# Altium PCB ST1-2-BASIS.PcbDoc (part 1 of 2)
Units mm, origin at the board's own origin, x right, y up, seen from the top; angles counter-clockwise.
Board outline 88 x 170 mm, 2 copper layers (Top Layer, Bottom Layer), stack 1.58 mm thick; 149 components, 86 nets, 501 pads, 138 vias.
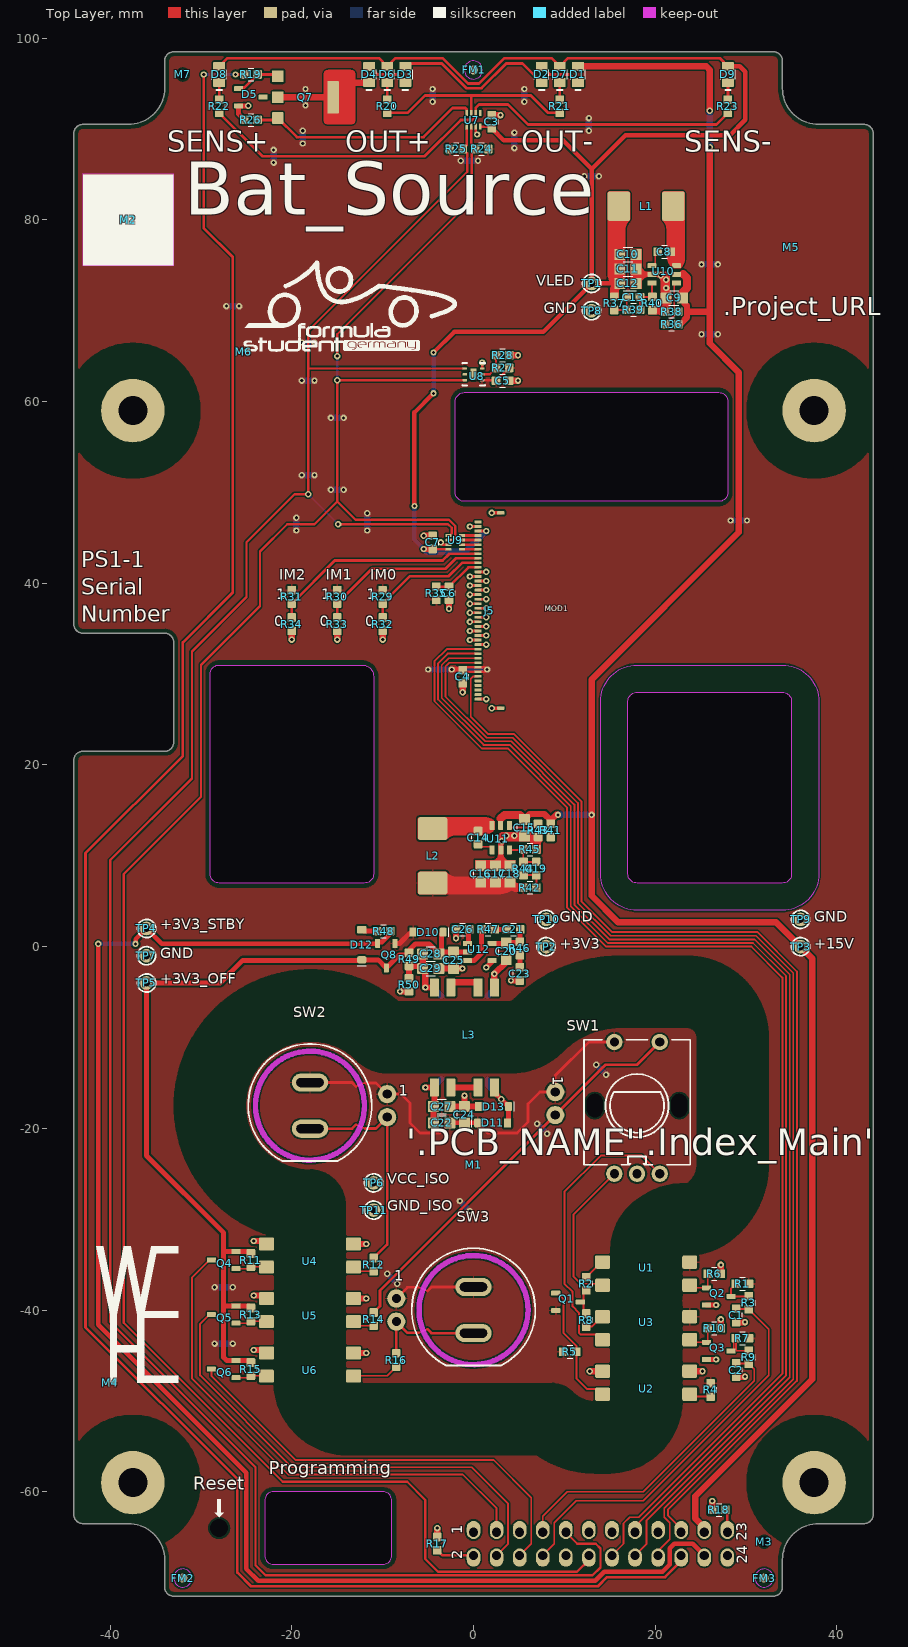
[diagram p0: Top Layer view]
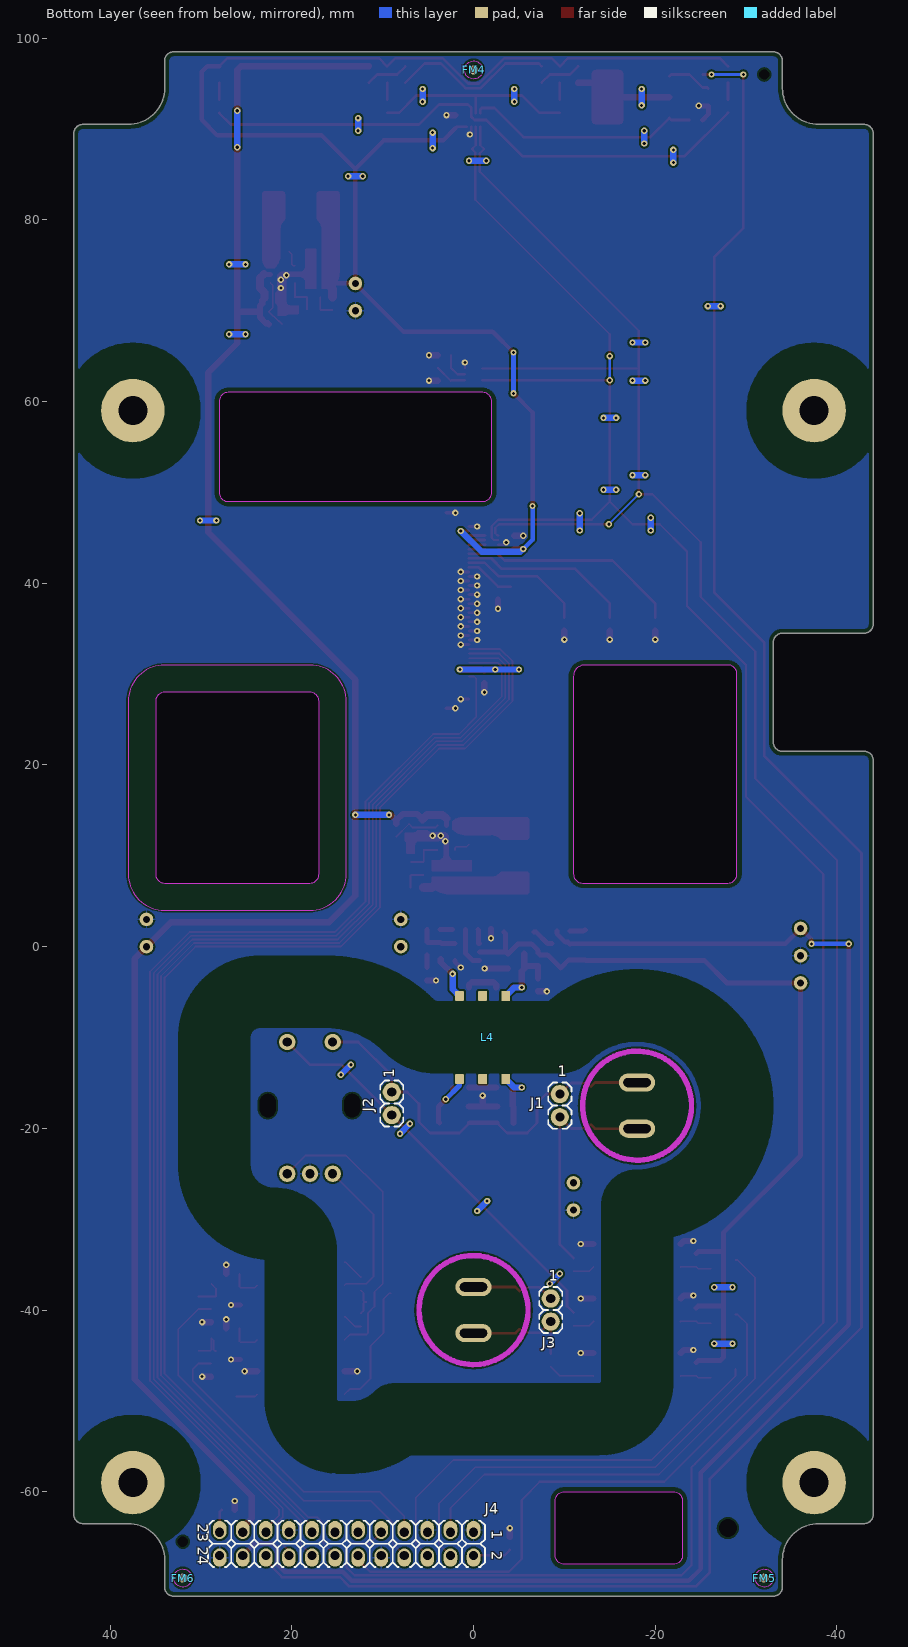
[diagram p1: Bottom Layer view, seen from below]

## Layer stack, top to bottom
Top Solder: solder mask 0.0102, Solder Resist, Dk 3.5
Top Layer: signal copper 0.035
Dielectric 1: dielectric 1.51, FR-4, Dk 4.8
Bottom Layer: signal copper 0.035
Bottom Solder: solder mask 0.0102, Solder Resist, Dk 3.5

## Board outline
-43,-63.5 cw(c-43,-62.5) -44,-62.5 -44,20.5 cw(c-43,20.5) -43,21.5 -34,21.5 ccw(c-34,22.5) -33,22.5 -33,33.5 ccw(c-34,33.5) -34,34.5 -43,34.5 cw(c-43,35.5) -44,35.5 -44,89.5 cw(c-43,89.5) -43,90.5 -38,90.5 ccw(c-38,94.5) -34,94.5 -34,97.5 cw(c-33,97.5) -33,98.5 33,98.5 cw(c33,97.5) 34,97.5 34,94.5 ccw(c38,94.5) 38,90.5 43,90.5 cw(c43,89.5) 44,89.5 44,-62.5 cw(c43,-62.5) 43,-63.5 38,-63.5 ccw(c38,-67.5) 34,-67.5 34,-70.5 cw(c33,-70.5) 33,-71.5 -33,-71.5 cw(c-33,-70.5) -34,-70.5 -34,-67.5 ccw(c-38,-67.5) -38,-63.5
cut-out: -23,-67 ccw(c-22,-67) -22,-68 -10,-68 ccw(c-10,-67) -9,-67 -9,-61 ccw(c-10,-61) -10,-60 -22,-60 ccw(c-22,-61) -23,-61
cut-out: -28,7 cw(c-28,8) -29,8 -29,30 cw(c-28,30) -28,31 -12.27,31 cw(c-12.27,29.73) -11,29.73 -11,8 cw(c-12,8) -12,7
cut-out: -1,49 cw(c-1,50) -2,50 -2,60 cw(c-1,60) -1,61 27,61 cw(c27,60) 28,60 28,50 cw(c27,50) 27,49
cut-out: 18,7 cw(c18,8) 17,8 17,27 cw(c18,27) 18,28 34,28 cw(c34,27) 35,27 35,8 cw(c34,8) 34,7

## Design rules (kind name [scope] priority, off if disabled: settings)
BoardOutlineClearance [not (InComponent('MOUSE*'))] p1: gap=0.5 ignorepadtopadclearanceinfootprint=FALSE except(0: Arc-SplitContinuation Track-SplitContinuation SMDPad-SplitContinuation THPad-SplitContinuation Via-SplitContinuation Fill-SplitContinuation Poly-SplitContinuation Region-SplitContinuation Text-SplitContinuation)
Clearance Clearance_Iso [InNetClass('ISO') vs Not (InNetClass('ISO') or not InNetClass('All Nets'))] p1: gap=8 ignorepadtopadclearanceinfootprint=FALSE except(0: Arc-Hole Track-Hole SMDPad-Hole THPad-Hole Via-Hole Fill-Hole Poly-Hole Region-Hole Text-Hole; 7.95: SMDPad-SMDPad)
Clearance Clearance_Mount [(ObjectKind = 'Pad') And (Net = 'No Net') And (Name = 'Free-M')] p2: gap=4 ignorepadtopadclearanceinfootprint=FALSE except(0: Arc-Hole Track-Hole SMDPad-Hole THPad-Hole Via-Hole Fill-Hole Poly-Hole Region-Hole Text-Hole)
Clearance [All] p3: gap=0.2 ignorepadtopadclearanceinfootprint=FALSE except(0: Arc-Hole Track-Hole SMDPad-Hole THPad-Hole Via-Hole Fill-Hole Poly-Hole Region-Hole Text-Hole; 0.15: Arc-Arc Arc-Track Arc-SMDPad Arc-THPad Arc-Via Arc-Text Track-Track Track-SMDPad Track-THPad Track-Via Track-Text SMDPad-SMDPad SMDPad-THPad SMDPad-Via SMDPad-Text THPad-THPad THPad-Via THPad-Text Via-Via Via-Text Text-Text)
ComponentClearance ComponentClearance_ESP-01S [All] p1: gap=0.254 collisioncheckmode=3 verticalgap=0.254 showdistances=FALSE
ComponentClearance ComponentClearance_Enclosure [isfree] p2: gap=0 collisioncheckmode=3 verticalgap=0 showdistances=FALSE
ComponentClearance [All] p3: gap=0.25 collisioncheckmode=3 verticalgap=0.25 showdistances=FALSE
Height [All] p1: minheight=0 maxheight=100 prefheight=12.7
HoleSize [All] p1: absolutevalues=TRUE maxlimit=27 minlimit=0.3 maxpercent=80.000 minpercent=20.000
HoleToHoleClearance [All] p1: gap=0.3 allowstackedmicrovias=TRUE
MinimumSolderMaskSliver [All] p1: minsoldermaskwidth=0.1
PolygonConnect [All] p1: thpad.connectstyle=Relief thpad.reliefconductorwidth=0.2 thpad.reliefentries=4 thpad.polygonreliefangle="90 Angle" thpad.airgapwidth=0.2 smdpad.connectstyle=Relief smdpad.reliefconductorwidth=0.2 smdpad.reliefentries=4 smdpad.polygonreliefangle="90 Angle" smdpad.airgapwidth=0.2 via.connectstyle=Direct via.reliefconductorwidth=0.254 via.reliefentries=4 via.polygonreliefangle="90 Angle" via.airgapwidth=0.254
RoomDefinition "User Input" [InComponentClass('User Input')] p1: confinementstyle=ConfineIn formatcopy=TRUE lockcomponents=FALSE outline -30,-4 -30,-51 32,-51 32,-4
RoomDefinition LED [InComponentClass('LED')] p2: confinementstyle=ConfineIn formatcopy=TRUE lockcomponents=FALSE outline -30,87 30,87 30,98 -30,98
RoomDefinition Display [InComponentClass('Display')] p3: confinementstyle=ConfineIn formatcopy=TRUE lockcomponents=FALSE outline -30,15 31,15 31,66 -30,66
RoomDefinition "Power VLED" [InComponentClass('Power VLED')] p4: confinementstyle=ConfineIn formatcopy=TRUE lockcomponents=FALSE outline 24,67 24,73 24,86 14,86 14,67
RoomDefinition "Backlight Driver" [InComponentClass('Backlight Driver')] p5: confinementstyle=ConfineIn formatcopy=TRUE lockcomponents=FALSE outline -6.5,43 -0.5,43 -0.5,67 -1.5,67 -1.5,47 -6.5,47
RoomDefinition "Isolated Power" [InComponentClass('Isolated Power')] p6: confinementstyle=ConfineIn formatcopy=TRUE lockcomponents=FALSE outline 6,3 -14,3 -14,-6 -6,-6 -6,-21 6,-21
RoomDefinition "Power +3V3" [InComponentClass('Power +3V3')] p7: confinementstyle=ConfineIn formatcopy=TRUE lockcomponents=FALSE outline 10,15 -9,15 -9,5 10,5
RoomDefinition Connector [InComponentClass('Connector')] p8: confinementstyle=ConfineIn formatcopy=TRUE lockcomponents=FALSE outline -5,-58.5 -5,-69.5 32,-69.5 32,-58.5
RoutingVias [All] p1: holewidth=0.35 width=0.7 viastyle="Through Hole" minholewidth=0.35 minwidth=0.7 maxholewidth=5 maxwidth=6
SilkToSilkClearance [All] p1: silktosilkclearance=0.1
SilkToSolderMaskClearance [IsPad] p1: minsilkscreentomaskgap=0.1 clearancetoexposedcopper=TRUE
SolderMaskExpansion "SolderMaskExpansion Via" [IsVia] p1: expansion=0.1 istentingtop=TRUE
SolderMaskExpansion [All] p2: expansion=0.05 istentingtop=FALSE
SupplyNets "Schematic Supply Nets_6" [InNet('GND_ISO')] p1: voltage=0.000
SupplyNets "Schematic Supply Nets_5" [InNet('+3V3_OFF')] p2: voltage=0.000
SupplyNets "Schematic Supply Nets_1" [InNet('VCC_ISO')] p3: voltage=0.000
SupplyNets "Schematic Supply Nets_4" [InNet('+15V')] p4: voltage=0.000
SupplyNets "Schematic Supply Nets_3" [InNet('VLED')] p5: voltage=0.000
SupplyNets "Schematic Supply Nets_2" [InNet('GND')] p6: voltage=0.000
SupplyNets "Schematic Supply Nets" [InNet('+3V3')] p7: voltage=0.000
UnRoutedNet [All] p1: checkbadconnections=TRUE
Width [All] p1: maxlimit=5 minlimit=0.15 preferedwidth=0.2 minimp=50.000000 maximp=50.000000 favimp=50.000000
22 further rules are at their usual default settings.

## Classes and differential pairs
net class ISO: BTN_ESC_ISO BTN_OK_ISO BTN_OUT_ISO GND_ISO NetC22_2 NetD11_2 NetL3_6 NetQ1_1 NetQ1_3 NetR2_2 NetR8_2 NetR12_2 NetR14_2 NetR16_2 NetSW1_A NetSW1_B VCC_ISO
component class "Isolated Power": C20 C21 C22 C23 C24 C25 C26 C27 C28 C29 D10 D11 D12 D13 L3 L4 Q8 R46 R47 R48 R49 R50 U12
component class "User Input": C1 C2 J1 J2 J3 Q1 Q2 Q3 Q4 Q5 Q6 R1 R2 R3 R4 R5 R6 R7 R8 R9 R10 R11 R12 R13 R14 R15 R16 SW1 SW2 SW3 U1 U2 U3 U4 U5 U6
component class "Power VLED": C8 C9 C10 C11 C12 C13 L1 R36 R37 R38 R39 R40 U10
component class "Power +3V3": C14 C15 C16 C17 C18 C19 L2 R41 R42 R43 R44 R45 U11
component class Display: C4 C5 C6 J5 MOD1 R27 R28 R29 R30 R31 R32 R33 R34 R35 U8
component class "Backlight Driver": C7 U9
component class PS1-2-Top: FM1 FM2 FM3 FM4 FM5 FM6 M1 M2 M3 M4 M5 M6 M7 TP1 TP2 TP3 TP4 TP5 TP6 TP7 TP8 TP9 TP10 TP11
component class Connector: J4 R17 R18
component class LED: C3 D1 D2 D3 D4 D5 D6 D7 D8 D9 Q7 R19 R20 R21 R22 R23 R24 R25 R26 U7

## Components (designator, comment, footprint, x,y, rotation, side; value= is the part's Value field where it differs from the comment)
C1 "100P/0603/50V/X7R" CAP0603_X7R 28.9,-40.6 r270 top value=100pF
C2 "100P/0603/50V/X7R" CAP0603_X7R 28.9,-46.6 r270 top value=100pF
C3 "100N/0603/50V/X7R" CAP0603_X7R 2,90.8 r90 top value=100nF
C4 "100N/0603/50V/X7R" CAP0603_X7R -1.2,29.7 r270 top value=100nF
C5 "100N/0603/50V/X7R" CAP0603_X7R 3.2,62.3 r0 top value=100nF
C6 "100N/0603/50V/X7R" CAP0603_X7R -2.7,38.9 r270 top value=100nF
C7 "100N/0603/50V/X7R" CAP0603_X7R -4.5,44.5 r90 top value=100nF
C8 "100N/0603/50V/X7R" CAP0603_X7R 21,76.5 r180 top value=100nF
C9 "10U/0805/50V/X5R" CAP0805_X7R 22.1,71.4 r180 top value=10uF
C10 "10U/0805/50V/X5R" CAP0805_X7R 17,76.2 r0 top value=10uF
C11 "10U/0805/50V/X5R" CAP0805_X7R 17,74.6 r0 top value=10uF
C12 "10U/0805/50V/X5R" CAP0805_X7R 17,73 r0 top value=10uF
C13 "47P/0603/50V/C0G" CAP0603_C0G 17.6,71.5 r0 top value=47pF
C14 "100N/0603/50V/X7R" CAP0603_X7R 0.5,12 r270 top value=100nF
C15 "10U/0805/50V/X5R" CAP0805_X7R 5.6,13.1 r270 top value=10uF
C16 "10U/0805/50V/X5R" CAP0805_X7R 0.8,8 r90 top value=10uF
C17 "10U/0805/50V/X5R" CAP0805_X7R 2.4,8 r90 top value=10uF
C18 "10U/0805/50V/X5R" CAP0805_X7R 4,8 r90 top value=10uF
C19 "47P/0603/50V/C0G" CAP0603_C0G 6.9,8.6 r90 top value=47pF
C20 "22U/0805/25V/X5R" CAP0805_X7R 3.6,-0.5 r270 top value=22uF
C21 "1U/0603/50V/X5R" CAP0603_X7R 4.4,1.9 r180 top value=1.0uF
C22 "4U7/0805/16V/X7R" CAP0805_X7R -3.5,-19.4 r180 top value=4.7uF
C23 "560P/0603/50V/C0G" CAP0603_C0G 5.1,-3 r270 top value=560pF
C24 "10U/0805/50V/X5R" CAP0805_X7R -1,-18.5 r90 top value=10uF
C25 "4U7/0805/16V/X7R" CAP0805_X7R -2.2,-1.5 r270 top value=4.7uF
C26 "1U/0603/50V/X5R" CAP0603_X7R -1.2,1.9 r180 top value=1.0uF
C27 "4U7/0805/16V/X7R" CAP0805_X7R -3.5,-17.6 r0 top value=4.7uF
C28 "10U/0805/50V/X5R" CAP0805_X7R -4.7,-0.8 r180 top value=10uF
C29 "10U/0805/50V/X5R" CAP0805_X7R -4.7,-2.4 r0 top value=10uF
D1 "LED Red" LED0805_RED 11.5,96 r90 top value=Red
D2 "LED Red" LED0805_RED 7.5,96 r90 top value=Red
D3 "LED Red" LED0805_RED -7.5,96 r90 top value=Red
D4 "LED Red" LED0805_RED -11.5,96 r90 top value=Red
D5 "BAV199" SOT2395P280X125-3-SE -24.5,93.5 r180 top
D6 "LED Green" LED0805_GREEN -9.5,96 r90 top value=Green
D7 "LED Green" LED0805_GREEN 9.5,96 r90 top value=Green
D8 "LED Green" LED0805_GREEN -28,96 r90 top value=Green
D9 "LED Green" LED0805_GREEN 28,96 r90 top value=Green
D10 "B5819W SL" SOD3718X125 -5,1.6 r180 top
D11 "B5819W SL" SOD3718X125 2.1,-19.4 r0 top
D12 "B5819W SL" SOD3718X125 -12.3,0.2 r90 top
D13 "B5819W SL" SOD3718X125 2.2,-17.6 r180 top
FM1 "Fidu" FIDU-1MM 0,96.5 r270 top
FM2 "Fidu" FIDU-1MM -32,-69.5 r270 top
FM3 "Fidu" FIDU-1MM 32,-69.5 r270 top
FM4 "Fidu" FIDU-1MM 0,96.5 r90 bottom
FM5 "Fidu" FIDU-1MM -32,-69.5 r90 bottom
FM6 "Fidu" FIDU-1MM 32,-69.5 r90 bottom
J1 "Header_1x2" HEAD_254_1X2 -9.5,-16.23 r180 bottom
J2 "Header_1x2" HEAD_254_1X2 9,-16 r180 bottom
J3 "Header_1x2" HEAD_254_1X2 -8.5,-38.73 r180 bottom
J4 "Header_2x12_8.34mm_2.5mm" HEAD_254_2X12_834_250 0,-64.46 r270 bottom
J5 "FPC_40_FH34SRJ" CON_FPC40_FH34SRJ 2.5,37 r90 top locked
L1 "22UH\7643" INDM7676X43 19,81.5 r180 top value=22UH
L2 "22UH\7643" INDM7676X43 -4.5,10 r270 top value=22UH
L3 "1:1.03/2MH/MXPP8" TR_MAXIN_MXPP8 -1,-10 r270 top
L4 "1:1.05/1.92MH/PPTI-1006" TR_WE_PPTI_1006-467 -1,-10 r270 bottom
M1 "PCB NAME" PCB-NAME-5MM-CENTER 0,-24 r0 top
M2 "SERIAL 2D" SERIAL-2D-10MM-RESTRICT -38,80 r0 top
M3 "Tooling JLC" TOOLING-JLC 32,-65.5 r270 top
M4 "LOGO WHE" LOGO-WHE-15MM -40,-48 r0 top
M5 "QR PROJ URL" QR-PROJECT-URL-15MM 35,77 r0 top
M6 "LOGO FSG" LOGO-FSG-10MM -25.3,65.5 r0 top
M7 "Tooling JLC" TOOLING-JLC -32,96 r270 top
MOD1 "NHD-2.4-240320AF-CSXP-2MM" NHD-2.4-240320AF-CSXP-2MM 0,37 r90 top locked
Q1 "BSS84" SOT2395P280X125-3-SE 10.4,-39.1 r180 top
Q2 "BSS138" SOT2395P280X125-3-SE 27,-38.5 r180 top
Q3 "BSS138" SOT2395P280X125-3-SE 27,-44.5 r180 top
Q4 "BSS84" SOT2395P280X125-3-SE -27.5,-34.5 r0 top
Q5 "BSS84" SOT2395P280X125-3-SE -27.5,-40.5 r0 top
Q6 "BSS84" SOT2395P280X125-3-SE -27.5,-46.5 r0 top
Q7 "BCP56T" SOT223-230P670X180-4-SW -18.5,93.5 r270 top
Q8 "BSS84" SOT2395P280X125-3-SE -9.6,-1 r90 top
R1 "10K/0603" R0603-0.40-WW 29.6,-37.1 r180 top value=10K
R2 "6K2/0603" R0603-0.40-WW 12.4,-37.1 r90 top value=6K2
R3 "100R/0603" R0603-0.40-WW 30.3,-39.2 r270 top value=100R
R4 "6K2/0603" R0603-0.40-WW 26.1,-48.8 r270 top value=6K2
R5 "100K/0603" R0603-0.40-WW 10.6,-44.6 r0 top value=100K
R6 "100K/0603" R0603-0.40-WW 26.5,-36 r0 top value=100K
R7 "10K/0603" R0603-0.40-WW 29.6,-43.1 r180 top value=10K
R8 "6K2/0603" R0603-0.40-WW 12.4,-41.1 r270 top value=6K2
R9 "100R/0603" R0603-0.40-WW 30.3,-45.2 r270 top value=100R
R10 "100K/0603" R0603-0.40-WW 26.5,-42 r0 top value=100K
R11 "100K/0603" R0603-0.40-WW -24.5,-34.5 r270 top value=100K
R12 "6K2/0603" R0603-0.40-WW -11,-35 r270 top value=6K2
R13 "100K/0603" R0603-0.40-WW -24.5,-40.5 r270 top value=100K
R14 "6K2/0603" R0603-0.40-WW -11,-41 r270 top value=6K2
R15 "100K/0603" R0603-0.40-WW -24.5,-46.5 r270 top value=100K
R16 "6K2/0603" R0603-0.40-WW -8.5,-45.5 r270 top value=6K2
R17 "10K/0603" R0603-0.40-WW -4,-65.7 r270 top value=10K
R18 "10K/0603" R0603-0.40-WW 27,-62 r180 top value=10K
R19 "2K/0603" R0603-0.40-WW -24.5,96 r0 top value=2K
R20 "10R/0603" R0603-0.40-WW -9.5,92.5 r270 top value=10R
R21 "10R/0603" R0603-0.40-WW 9.5,92.5 r270 top value=10R
R22 "10R/0603" R0603-0.40-WW -28,92.5 r270 top value=10R
R23 "10R/0603" R0603-0.40-WW 28,92.5 r270 top value=10R
R24 "4K7/0603" R0603-0.40-WW 0.9,87.8 r180 top value=4K7
R25 "4K7/0603" R0603-0.40-WW -1.9,87.8 r0 top value=4K7
R26 "360R/0603" R0603-0.40-WW -24.5,91 r180 top value=360R
R27 "10K/0603" R0603-0.40-WW 3.2,63.7 r180 top value=10K
R28 "10K/0603" R0603-0.40-WW 3.2,65.1 r0 top value=10K
R29 "10K/0603" R0603-0.40-WW -10,38.5 r270 top value=10K
R30 "10K/0603" R0603-0.40-WW -15,38.5 r270 top value=10K
R31 "10K/0603" R0603-0.40-WW -20,38.5 r270 top value=10K
R32 "10K/0603" R0603-0.40-WW -10,35.5 r270 top value=10K
R33 "10K/0603" R0603-0.40-WW -15,35.5 r270 top value=10K
R34 "10K/0603" R0603-0.40-WW -20,35.5 r270 top value=10K
R35 "10K/0603" R0603-0.40-WW -4.1,38.9 r90 top value=10K
R36 "120K/0603" R0603-0.40-WW 21.8,68.5 r180 top value=120K
R37 "10R/0603" R0603-0.40-WW 15.5,70.8 r270 top value=10R
R38 "30K/0603" R0603-0.40-WW 21.8,69.9 r180 top value=30K
R39 "30K/0603" R0603-0.40-WW 17.6,70.1 r0 top value=30K
R40 "10K/0603" R0603-0.40-WW 19.7,70.8 r270 top value=10K
R41 "120K/0603" R0603-0.40-WW 8.5,12.8 r270 top value=120K
R42 "10R/0603" R0603-0.40-WW 6.2,6.5 r0 top value=10R
R43 "30K/0603" R0603-0.40-WW 7.1,12.8 r270 top value=30K
R44 "62K/0603" R0603-0.40-WW 5.5,8.6 r90 top value=62K
R45 "27K/0603" R0603-0.40-WW 6.2,10.7 r0 top value=27K
R46 "10R/0603" R0603-0.40-WW 5.1,-0.2 r270 top value=10R
R47 "1K/0603" R0603-0.40-WW 1.6,1.9 r180 top value=1K
R48 "0R/0603" R0603-0.40-WW -9.9,1.7 r180 top value=0R
R49 "1M/0603" R0603-0.40-WW -7.1,-1.4 r270 top value=1M
R50 "1M/0603" R0603-0.40-WW -7.1,-4.2 r270 top value=1M
SW1 "MERP11-15125BM7" MERP11-15125BM7 18,-17.5 r0 top
SW2 "BTN 14MM BLACK" RS-BUTTON-14MM-BLACK -18,-17.5 r270 top locked
SW3 "BTN 14MM RED" RS-BUTTON-14MM-RED 0,-40 r270 top locked
TP1 "TP_THD_1.5/0.8" TP_THD_1.5/0.8 13,73 r0 top
TP2 "TP_THD_1.5/0.8" TP_THD_1.5/0.8 8,0 r0 top
TP3 "TP_THD_1.5/0.8" TP_THD_1.5/0.8 36,0 r0 top
TP4 "TP_THD_1.5/0.8" TP_THD_1.5/0.8 -36,2 r0 top
TP5 "TP_THD_1.5/0.8" TP_THD_1.5/0.8 -36,-4 r0 top
TP6 "TP_THD_1.5/0.8" TP_THD_1.5/0.8 -11,-26 r0 top
TP7 "TP_THD_1.5/0.8" TP_THD_1.5/0.8 -36,-1 r0 top
TP8 "TP_THD_1.5/0.8" TP_THD_1.5/0.8 13,70 r0 top
TP9 "TP_THD_1.5/0.8" TP_THD_1.5/0.8 36,3 r0 top
TP10 "TP_THD_1.5/0.8" TP_THD_1.5/0.8 8,3 r0 top
TP11 "TP_THD_1.5/0.8" TP_THD_1.5/0.8 -11,-29 r0 top
U1 "PC817C SMD" SOP254P1020X410-4 19,-36 r0 top
U2 "PC817C SMD" SOP254P1020X410-4 19,-48 r180 top
U3 "PC817C SMD" SOP254P1020X410-4 19,-42 r0 top
U4 "PC817C SMD" SOP254P1020X410-4 -18,-34 r180 top
U5 "PC817C SMD" SOP254P1020X410-4 -18,-40 r180 top
U6 "PC817C SMD" SOP254P1020X410-4 -18,-46 r180 top
U7 "LP5817DRLR" SOT50P210X60-8-SE 0,91 r270 top
U8 "OPT3004DNPR" SON065P200X200X65-6-EP065X130-CLEAR 0,63 r180 top
U9 "LP5816DRLR" SOT50P210X60-8-SE -2,44.5 r180 top
U10 "LV3842XF" SOT2395P280X125-6-NW 21,74 r0 top
U11 "LV3842XF" SOT2395P280X125-6-NW 3,12 r90 top
U12 "TPS60400" SOT2395P280X125-5-SW 0.7,-0.6 r270 top

## Footprints (in the part's own frame and the unit in brackets; to place one, negate y for a bottom-side part, rotate by r counter-clockwise, add the part's x,y. Pads: shape width x height; smd on the part's side, far side on the other; paste and mask are expansions set on the pad)
CAP0603_C0G [mm]
  rrect20% 0.95x0.95 smd: 1(-0.725,0) 2(0.725,0)
  silkscreen extent -0.3,-0.7 0.3,0.7, body extent -0.8,-0.41 0.8,0.41, height 0.57
CAP0603_X7R [mm]
  rrect20% 0.95x0.95 smd: 1(-0.725,0) 2(0.725,0)
  silkscreen extent -0.3,-0.7 0.3,0.7, body extent -0.8,-0.41 0.8,0.41, height 0.57
CAP0805_X7R [mm] "Chip Capacitor 0805mil / 2012mm"
  rrect10% 1.2x1.2 smd: 1(-0.9,0) 2(0.9,0)
  silkscreen extent -0.5,-0.8 0.5,0.8, body extent -1,-0.51 1,0.51, height 0.72
CON_FPC40_FH34SRJ [mm] "Hirose FH34SRJ 40-pin FPC connector"
  rrect50% 0.3x0.8 smd: 1(9.75,2) 2(9.25,2) 3(8.75,2) 4(8.25,2) 5(7.75,2) 6(7.25,2) 7(6.75,2) 8(6.25,2) 9(5.75,2) 10(5.25,2) 11(4.75,2) 12(4.25,2) 13(3.75,2) 14(3.25,2) 15(2.75,2) 16(2.25,2) 17(1.75,2) 18(1.25,2) 19(0.75,2) 20(0.25,2) 21(-0.25,2) 22(-0.75,2) 23(-1.25,2) 24(-1.75,2) 25(-2.25,2) 26(-2.75,2) 27(-3.25,2) 28(-3.75,2) 29(-4.25,2) 30(-4.75,2) 31(-5.25,2) 32(-5.75,2) 33(-6.25,2) 34(-6.75,2) 35(-7.25,2) 36(-7.75,2) 37(-8.25,2) 38(-8.75,2) 39(-9.25,2) 40(-9.75,2)
  rrect50% 0.4x0.8 smd: M1(10.75,-0.5) M2(-10.75,-0.5)
  body extent -11,-1 11,2.8, height 1
FIDU-1MM [mm] "Fiducial 1mm"
  round 1 smd mask+0.5: 1(0,0)
  Top Layer keep-out circle w0.1: c0,0 r1
HEAD_254_1X2 [mm] "Header 2.54mm 1x2"
  round 2 hole 1: 1(0,0) 2(0,-2.54)
  silkscreen extent -1.27,-3.81 1.27,1.27, body extent -1.27,-3.81 1.27,1.27, height 10
HEAD_254_2X12_834_250 [mm] "Header 2.54mm 2x12, Height 8.34mm, flange height 2.5mm"
  oval 2x1.5 hole 1 copper offset -0.25,0: 1(0,0) 3(0,-2.54) 5(0,-5.08) 7(0,-7.62) 9(0,-10.16) 11(0,-12.7) 13(0,-15.24) 15(0,-17.78) 17(0,-20.32) 19(0,-22.86) 21(0,-25.4) 23(0,-27.94)
  oval 2x1.5 hole 1 copper offset 0.25,0: 2(2.54,0) 4(2.54,-2.54) 6(2.54,-5.08) 8(2.54,-7.62) 10(2.54,-10.16) 12(2.54,-12.7) 14(2.54,-15.24) 16(2.54,-17.78) 18(2.54,-20.32) 20(2.54,-22.86) 22(2.54,-25.4) 24(2.54,-27.94)
  silkscreen extent -1.27,-29.21 3.81,1.27, body extent -1.27,-29.21 3.81,1.27, height 8.34
INDM7676X43 [mm]
  rrect20% 2.5x3.25 smd: 1(-3,0) 2(3,0)
  body extent -3.8,-3.8 3.8,3.8, height 4.3
LED0805_GREEN [mm]
  rrect20% 1x1.3 smd: 1(-0.9,0) 2(0.9,0)
  silkscreen extent -1.7,-0.8 0.5,0.8, body extent -1,-0.6 1,0.6, height 0.8
LED0805_RED [mm]
  rrect20% 1x1.3 smd: 1(-0.9,0) 2(0.9,0)
  silkscreen extent -1.7,-0.8 0.5,0.8, body extent -1,-0.6 1,0.6, height 0.8
LOGO-FSG-10MM [mm] "Source: https://www.formulastudent.de/pr/logos /  / Terms of use / Nutzungsbedingungen /  / \"Formula Student\" is registered trademark. The FSG logos are also subject to international copyright laws.  /  / EN: The right to use the FSG logo in an appropriate context is reserved to the teams, to the sponsors of the FSG event and to the press reporting on FSG. Other parties including the teams' sponsors are not allowed to use the FSG logo for any purpose. /  / DE: Teams, Sponsoren des FSG-Wettbewerb und Presse, die über die FSG berichtet, dürfen das FSG-Logo im entsprechenden Kontext frei verwenden. Anderen, die Sponsoren der Teams eingeschlossen, ist die Verwendung des FSG-Logos nicht gestattet."
  silkscreen extent 0.01,0.01 23.47,10.01, body extent 0.01,0.01 23.47,10.01, height 0.05
LOGO-WHE-15MM [mm]
  silkscreen extent -1.5,0 7.5,15
MERP11-15125BM7 [mm] "Knitter Switch MERP11-15125BM7 Encode with switch"
  round 1.8 hole 1: 1(-2.5,7) 2(2.5,7) A(-2.5,-7.5) B(2.5,-7.5) C(0,-7.5)
  round 0 hole 1.8 slot 2.6 at 90 deg unplated: M(-4.65,0) M(4.65,0)
  silkscreen extent -5.85,-6.5 5.85,7.25, body extent -5.85,-7.67 5.85,7.25, height 31.6
NHD-2.4-240320AF-CSXP-2MM [mm]
  body extent -21.4,-30.05 21.4,29.86, height 4.56
PCB-NAME-5MM-CENTER [mm]
QR-PROJECT-URL-15MM [mm] "QR Code Project URL 15mm"
R0603-0.40-WW [mm]
  rrect20% 0.95x0.95 smd: 1(-0.725,0) 2(0.725,0)
  silkscreen extent -0.3,-0.7 0.3,0.7, body extent -0.8,-0.4 0.8,0.4, height 0.3
RS-BUTTON-14MM-BLACK [mm]
  oval 2x4 hole 1 slot 3 at 90 deg: 1(-2.54,0) 2(2.54,0)
  silkscreen extent -6.8,-6.8 6.1,6.8, body extent -8.74,-8.75 8.75,8.75, height 18
RS-BUTTON-14MM-RED [mm]
  oval 2x4 hole 1 slot 3 at 90 deg: 1(-2.54,0) 2(2.54,0)
  silkscreen extent -6.8,-6.8 6.1,6.8, body extent -8.74,-8.75 8.75,8.75, height 18
SERIAL-2D-10MM-RESTRICT [mm] "Placeholder for 2D serial number (Dotmatrix or QR) / Size: 10mm"
  Top Layer keep-out region: -5,-5 5,-5 5,5 -5,5
  silkscreen extent -5,-5 5,5
SOD3718X125 [mm] "SOD-123"
  rrect50% 0.8x1 smd: 1(-1.65,0)
  rrect10% 0.8x1 smd: 2(1.65,0)
  silkscreen extent -2.3,-0.5 -2.3,0.5, body extent -1.85,-0.8 1.85,0.8, height 1.25
SON065P200X200X65-6-EP065X130-CLEAR [mm] "SON, 6-Leads, Body 2.00x2.00mm, Pitch 0.65mm, Thermal Pad 1.30x0.65mm, clear, IPC Medium Density"
  round 0.4 on Top Overlay: 1(-1.7,1.05)
  rrect50% 0.5x0.25 smd: 1(-0.95,0.65) 2(-0.95,0) 3(-0.95,-0.65) 4(0.95,-0.65) 5(0.95,0) 6(0.95,0.65)
  rrect20% 0.65x1.3 smd: EP(0,0)
  silkscreen extent -1.25,-1.25 1.25,1.25, body extent -1.07,-1.05 1.07,1.05, height 0.65
SOP254P1020X410-4 [mm] "SOP, 4-Leads, Body 4.60x6.50mm, Pitch 2.54mm, IPC Medium Density"
  rrect20% 1.65x1.45 smd: 1(-4.8,1.27) 2(-4.8,-1.27) 3(4.8,-1.27) 4(4.8,1.27)
  round 0.4 on Top Overlay: 1(-4.8,2.545)
  body extent -5.08,-2.45 5.08,2.45, height 4.1
SOT50P210X60-8-SE [mm] "SOT583"
  rrect25% 0.67x0.3 smd: 1(0.74,-0.75) 2(0.74,-0.25) 3(0.74,0.25) 4(0.74,0.75) 5(-0.74,0.75) 6(-0.74,0.25) 7(-0.74,-0.25) 8(-0.74,-0.75)
  round 0.2 on Top Overlay: 1(0.775,-1.175)
  body extent -0.8,-1.05 0.8,1.05, height 0.6
SOT223-230P670X180-4-SW [mm]
  rrect20% 1.3x1.3 smd: 1(-2.3,-3.05) 2(0,-3.05) 3(2.3,-3.05)
  rrect20% 3.6x1.3 smd: 4(0,3.05)
  body extent -3.5,-3.65 3.5,3.65, height 1.8
SOT2395P280X125-3-SE [mm] "SOT23-3, SC74"
  rrect25% 1x0.55 smd: 1(1.35,-0.95) 2(1.35,0.95) 3(-1.35,0)
  round 0.4 on Top Overlay: 1(1.6,-1.6)
  body extent -1.4,-1.45 1.4,1.45, height 1.26
SOT2395P280X125-5-SW [mm] "SOT23-5"
  round 0.4 on Top Overlay: 1(-1.6,-1.6)
  rrect25% 0.55x1 smd: 1(-0.95,-1.35) 2(0,-1.35) 3(0.95,-1.35) 4(0.95,1.35) 5(-0.95,1.35)
  body extent -1.45,-1.4 1.45,1.4, height 1.26
SOT2395P280X125-6-NW [mm] "SOT23-6"
  round 0.4 on Top Overlay: 1(-1.6,1.6)
  rrect25% 1x0.55 smd: 1(-1.35,0.95) 2(-1.35,0) 3(-1.35,-0.95) 4(1.35,-0.95) 5(1.35,0.01) 6(1.35,0.95)
  body extent -1.4,-1.45 1.4,1.45, height 1.26
TOOLING-JLC [mm] "Tooling holes as specified by JLCPCB"
  round 0 hole 1.152 unplated paste-2539.97 mask+0.65: 0(0,0)
TP_THD_1.5/0.8 [mm] "Testpoint THD 1.5mm / 0.8mm"
  round 1.5 hole 0.8: 1(0,0)
  silkscreen extent -1,-1 1,1
TR_MAXIN_MXPP8 [mm]
  round 0.4 on Top Overlay: 1(-6.1,4.2)
  rrect20% 2x1 smd: 1(-5.5,3.3) 2(-5.5,1.5) 3(-5.5,-1.5) 4(-5.5,-3.3) 5(5.5,-3.3) 6(5.5,-1.5) 7(5.5,1.5) 8(5.5,3.3)
  body extent -6.1,-4.25 6.1,4.25, height 3.61
TR_WE_PPTI_1006-467 [mm] "WE-PPTI push-pull-transformer, size 1006"
  rrect20% 1.12x0.96 smd: 1(-4.57,2.54) 2(-4.57,0) 3(-4.57,-2.54) 4(4.57,-2.54) 5(4.57,0) 6(4.57,2.54)
  round 0.4 on Bottom Overlay: 1(-4.455,3.559)
  body extent -5.1,-3.36 5.1,3.36, height 4.68

## Part data
C1 C2: "CAP SM 0603 100pF 50V X7R", Absolute Value=1E-10, Manufacturer=GENERIC, Manufacturer 1=YAGEO, Manufacturer Part Number 1=CC0603KPX7R9BB101, Manufacturer Part Number 2=CC0603KRX7R9BB101, Package=0603, Supplier Part Number 1=13-CC0603KPX7R9BB101CT-ND, Eurocircuits GPN=GPC0603101, HelpURL=https://www.yageo.com/upload/media/product/app/datasheet/mlcc/upy-gphc_x7r_6_3v-to-250v.pdf, Manufacturer 2=YAGEO, Part Number=100P/0603/50V/X7R, Supplier 1=Digi-Key, Supplier 2=Digi-Key, Supplier Part Number 2=311-3601-1-ND
C3 C4 C5 C6 C7 C8 C14: "CAP SM 0603 100nF 50V X7R", Absolute Value=1E-7, JLC Type=Basic, Manufacturer=GENERIC, Manufacturer 1=YAGEO, Manufacturer Part Number 1=CC0603KPX7R9BB104, Manufacturer Part Number 2=CC0603MRX7R9BB104, Manufacturer Part Number 3=CC0603KRX7R9BB104, Package=0603, Supplier Part Number 1=311-3567-1-ND, Eurocircuits GPN=GPC0603104, HelpURL=https://www.yageo.com/upload/media/product/app/datasheet/mlcc/upy-gphc_x7r_6_3v-to-250v.pdf, Manufacturer 2=YAGEO, Part Number=100N/0603/50V/X7R, Supplier 1=Digi-Key, Supplier 2=Digi-Key, Supplier 3=LCSC, Supplier Part Number 2=311-4110-1-ND, Supplier Part Number 3=C14663
C9 C10 C11 C12 C15 C16 C17 C18 C24 C28 C29: "CAP SM 0805 10uF 50V X5R", Absolute Value=1E-5, JLC Type=Basic, Manufacturer=GENERIC, Manufacturer 1="Murata Electronics", Manufacturer Part Number 1=GRM21BR61H106KE43K, Manufacturer Part Number 3=GRM21BR61H106KE43L, Package=0805, Supplier Part Number 1=490-GRM21BR61H106KE43KCT-ND, Eurocircuits GPN=GPN0805106-50-X5R, HelpURL=https://search.murata.co.jp/Ceramy/image/img/A01X/G101/ENG/GRM21BR61H106KE43-01A.pdf, Part Number=10U/0805/50V/X5R, Supplier 1=Digi-Key, Supplier 3=LCSC, Supplier Part Number 3=C440198
C13 C19: "CAP SM 0603 47pF 50V C0G", Absolute Value=4.7E-11, JLC Type=Basic, Manufacturer=GENERIC, Manufacturer 1=YAGEO, Manufacturer Part Number 1=CC0603JRNPO9BN470, Manufacturer Part Number 2=CC0603KRNPO9BN470, Manufacturer Part Number 3=CL10C470JB8NNNC, Package=0603, Supplier Part Number 1=311-1065-1-ND, Eurocircuits GPN=GPC0603470-C0G, HelpURL=https://www.yageo.com/upload/media/product/productsearch/datasheet/mlcc/UPY-GP_NP0_16V-to-50V_18.pdf, Manufacturer 2=YAGEO, Part Number=47P/0603/50V/C0G, Supplier 1=Digi-Key, Supplier 2=Digi-Key, Supplier 3=LCSC, Supplier Part Number 2=311-4037-1-ND, Supplier Part Number 3=C1671
C20: "CAP SM 0805 22uF 25V X5R", Absolute Value=2.2E-5, JLC Type=Basic, Manufacturer=GENERIC, Manufacturer 1="Samsung Electro-Mechanics", Manufacturer Part Number 1=CL21A226MAYNNNE, Manufacturer Part Number 3=CL21A226MAQNNNE, Package=0805, Supplier Part Number 1=1276-CL21A226MAYNNNECT-ND, Eurocircuits GPN=GPN0805106-25, HelpURL=https://mm.digikey.com/Volume0/opasdata/d220001/medias/docus/339/CL21A226MAYNNNE_Spec.pdf, Part Number=22U/0805/25V/X5R, Supplier 1=Digi-Key, Supplier 3=LCSC, Supplier Part Number 3=C45783
C21 C26: "CAP SM 0603 1.0uF 50V X5R", Absolute Value=1E-6, JLC Type=Basic, Manufacturer=GENERIC, Manufacturer 1="Samsung Electro-Mechanics", Manufacturer Part Number 1=CL10A105KB8NNNC, Package=0603, Supplier Part Number 1=1276-1860-1-ND, Eurocircuits GPN=GPC0603105-X5R, HelpURL=https://mm.digikey.com/Volume0/opasdata/d220001/medias/docus/658/CL10A105KB8NNNC_Spec.pdf, Manufacturer Part Number 3=CL10A105KB8NNNC, Part Number=1U/0603/50V/X5R, Supplier 1=Digi-Key, Supplier 3=LCSC, Supplier Part Number 3=C15849
C22 C25 C27: "CAP SM 0805 4.7uF 16V X7R", Absolute Value=4.7E-6, Manufacturer=GENERIC, Manufacturer 1=Murata, Manufacturer Part Number 1=GRM21BR71C475KE51L, Manufacturer Part Number 3=TCC0603X5R475M160CT, Package=0805, Supplier Part Number 1=490-14466-1-ND, Eurocircuits GPN=GPN0805475-16, HelpURL=https://search.murata.co.jp/Ceramy/image/img/A01X/G101/ENG/GRM21BR71C475KE51-01.pdf, Part Number=4U7/0805/16V/X7R, Supplier 1=Digi-Key, Supplier 3=LCSC, Supplier Part Number 3=C7393897
C23: "CAP SM 0603 560pF 50V C0G", Absolute Value=5.6E-10, JLC Type=Extended, Manufacturer=GENERIC, Manufacturer 1=YAGEO, Manufacturer Part Number 1=CC0603JRNPO9BN561, Manufacturer Part Number 2=CC0603GRNPO9BN561, Package=0603, Supplier Part Number 1=311-3359-1-ND, Eurocircuits GPN=GPC0603561-C0G, HelpURL=https://www.yageo.com/upload/media/product/productsearch/datasheet/mlcc/UPY-GP_NP0_16V-to-50V_18.pdf, Manufacturer 2=YAGEO, Manufacturer Part Number 3=CC0603JRNPO9BN561, Part Number=560P/0603/50V/C0G, Supplier 1=Digi-Key, Supplier 2=Digi-Key, Supplier 3=LCSC, Supplier Part Number 2=311-3937-1-ND, Supplier Part Number 3=C107054
D1 D2 D3 D4: library part "LED Red 0805", "Generic LED Red 0805", Absolute Value=Red, JLC Type=Basic, Manufacturer=GENERIC, Manufacturer 1=Würth, Manufacturer 3="Foshan NationStar Optoelectronics", Manufacturer Part Number 1=150080RS75000, Manufacturer Part Number 3=NCD0805R1, Package=805, Supplier Part Number 1=732-4984-1-ND, HelpURL=https://www.we-online.com/katalog/datasheet/150060RS75000.pdf, Part Number="LED Red 0805", Supplier 1=Digikey, Supplier 3=LCSC, Supplier Part Number 3=C84256
D5: "Silicon Low Leakage Diode 85V", Absolute Value=85V, Manufacturer="Infineon Technologies", Manufacturer 3=LRC, Manufacturer Part Number 1=BAV199E6433HTMA1, Manufacturer Part Number 3=LBAV199LT1G, Package=SOT23, Supplier Part Number 1=BAV199E6433HTMA1CT-ND, HelpURL=https://www.infineon.com/dgdl/bav199series.pdf?folderId=db3a30431400ef6801141c748874044e&fileId=db3a30431400ef6801141cba733104e5, Manufacturer 1="Infineon Technologies", Part Number=BAV199, Supplier 1=Digikey, Supplier 3=LCSC, Supplier Part Number 3=C12740
D6 D7 D8 D9: library part "LED Green 0805", "Generic LED Green 0805", Absolute Value=Green, JLC Type=Basic, Manufacturer=GENERIC, Manufacturer 1=Würth, Manufacturer 3="Hubei KENTO Elec", Manufacturer Part Number 1=150080GS75000, Manufacturer Part Number 3=KT-0805G, Package=805, Supplier Part Number 1=732-4983-1-ND, HelpURL=https://www.we-online.com/katalog/datasheet/150060VS75000.pdf, Part Number="LED Green 0805", Supplier 1=Digikey, Supplier 3=LCSC, Supplier Part Number 3=C2297
D10 D11 D12 D13: "40V 600mV@1A 1A SOD-123 Schottky Barrier Diodes", Absolute Value=40V, JLC Type=Basic, Manufacturer=GENERIC, Manufacturer 1="SMC Diode Solutions", Manufacturer 3="Jiangsu Changjing Electronics Technology Co., Ltd.", Manufacturer Part Number 1=B5819WSL, Package=SOD-123, Supplier Part Number 1=1655-B5819WSLCT-ND, HelpURL=https://datasheet.lcsc.com/lcsc/2304140030_Jiangsu-Changjing-Electronics-Technology-Co---Ltd--B5819W-SL_C8598.pdf, Manufacturer Part Number 3="B5819W SL", Part Number="B5819W SL", Supplier 1=Digikey, Supplier 3=LCSC, Supplier Part Number 3=C8598
FM1 FM2 FM3 FM4 FM5 FM6: library part Fidu_1mm, "Fiducial 1mm", Manufacturer=NONE, Part Number=Fidu_1mm
J1 J2 J3: "Header 100 mil 1x2", Manufacturer=GENERIC, Part Number=Header_1x2, System=Connector
J4: "Header 100 mil 2x12, Height 8.34mm, flange height 2.5mm", Manufacturer=GENERIC, Manufacturer 1="Sullins Connector Solutions", Manufacturer Part Number 1=PRPC012DAAN-RC, Supplier Part Number 1=S2011EC-12-ND, Part Number=Header_2x12_8.34mm_2.5mm, Supplier 1=Digi-Key, System=Connector
J5: "FPC connector, FH34 series, 40 pins", JLC Type=Extended, Manufacturer=Hirose, Manufacturer 1="Hirose Electric Co Ltd", Manufacturer 3=HRS, Manufacturer Part Number 1=FH34SRJ-40S-0.5SH(50), Supplier Part Number 1=H125755CT-ND, HelpURL=https://www.hirose.com/en/product/document?clcode=CL0580-1260-6-50&productname=FH34SRJ-40S-0.5SH(50)&series=FH34SRJ&documenttype=2DDrawing&lang=en&documentid=0001483059, Manufacturer Part Number 3=FH34SRJ-40S-0.5SH(50), Part Number=FPC_40_FH34SRJ, Supplier 1=Digi-Key, Supplier 3=LCSC, Supplier Part Number 3=C506798, System=Connector
L1 L2: "FIXED IND 22UH 1.75A 92.5MOHM SM", Absolute Value=2.2E-5, Manufacturer="Eaton - Electronics Division", Manufacturer 3="SXN(Shun Xiang Nuo Elec)", Manufacturer Part Number 1=DR74-220-R, Manufacturer Part Number 3=SMDRI74-220M, Package=7643, Supplier Part Number 1=513-1390-1-ND, HelpURL=https://www.eaton.com/content/dam/eaton/products/electronic-components/resources/data-sheet/eaton-dr-high-power-density-high-efficiency-shielded-drum-core-power-inductors-data-sheet.pdf, Manufacturer 1="Eaton - Electronics Division", Part Number=22UH\7643, Supplier 1=Digi-Key, Supplier 3=LCSC, Supplier Part Number 3=C164083
L3: "MXPP8 Push-Pull Transformer, Turns ratio 1:1.03, 2mH, Size MXPP8", JLC Type=Extended, Manufacturer="Wuxi Maxinmicro", Manufacturer Part Number 3=MXPP8-30-1103, Package=MXPP8, HelpURL=https://www.lcsc.com/datasheet/C19943836.pdf, Manufacturer 3="Wuxi Maxinmicro", Part Number=1:1.03/2MH/MXPP8, Supplier 3=LCSC, Supplier Part Number 3=C19943836
L4: "WE-PPTI Push-Pull Transformer, Turns ratio 1:1.05, 1.92mH, Size 1006, 750317829", Manufacturer=WE, Manufacturer 1="Würth Elektronik", Manufacturer 2="Wurth Elektronik", Manufacturer Part Number 1=750317829, Package=1006, Supplier Part Number 1=1297-750317829CT-ND, HelpURL=https://www.we-online.com/components/products/datasheet/750317829.pdf, Manufacturer Part Number 2=750317829, Part Number=1:1.05/1.92MH/PPTI-1006, Supplier 1=Digi-Key, Supplier 2=Mouser, Supplier Part Number 2=710-750317829
M1: library part "PCB NAME 5mm C", "PCB name, 5mm text height, centered", Manufacturer=NONE, Part Number="PCB NAME 5mm C"
M2: library part "SERIAL 2D 10MM RESTRICT", "2D Serial number placeholder, Dotmatrix or QR, size: 10mm, restriction on top layer", Manufacturer=NONE, Part Number="SERIAL 2D 10MM RESTRICT"
M3 M7: "Tooling hole for JLC (1.152mm)", Manufacturer=NONE, Part Number="Tooling JLC"
M4: library part "LOGO WHE 15MM", "WHE logo, size 15mm", Manufacturer=NONE, Part Number="LOGO WHE 15MM"
M5: library part "QR PROJ URL 15MM", "QR Code, Project URL, 15mm", Manufacturer=NONE, Part Number="QR PROJ URL 15MM"
M6: library part "LOGO FSG 10MM", "FSG logo, size 10mm", Manufacturer=NONE, Part Number="LOGO FSG 10MM"
MOD1: "NHD-2.4-240320AF-CSXP TFT Liquid Crystal Display, 2.4\", 240x320, RGB, high brightness, 2mm above PCB", Manufacturer="Newhaven Display", Manufacturer 1="Newhaven Display Intl", Manufacturer Part Number 1=NHD-2.4-240320AF-CSXP, Package="Display Module", Supplier Part Number 1=757-NHD-2.4-240320AF-CSXP-ND, HelpURL=https://newhavendisplay.com/content/specs/NHD-2.4-240320AF-CSXP.pdf, Part Number=NHD-2.4-240320AF-CSXP-2MM, Supplier 1=Digi-Key
Q1 Q4 Q5 Q6 Q8: "50V P-Channel MOSFET", JLC Type=Extended, Manufacturer=GENERIC, Manufacturer 1="Good-Ark Semiconductor", Manufacturer 2=LRC, Manufacturer 3="Jiangsu Changjing Electronics Technology Co., Ltd.", Manufacturer Part Number 2=LBSS84LT1G, Package=SOT23, Supplier Part Number 1=4786-BSS84CT-ND, HelpURL=https://goodarksemi.com/docs/datasheets/mosfets/BSS84.pdf, Manufacturer Part Number 1=BSS84, Manufacturer Part Number 3=BSS84, Part Number=BSS84, Supplier 1=Digi-Key, Supplier 2=LCSC, Supplier 3=LCSC, Supplier Part Number 2=C8492, Supplier Part Number 3=C114481
Q2 Q3: "N-Kanal 50 V 220mA (Ta) 350mW (Ta) Oberflächenmontage SOT-23", JLC Type=Extended, Manufacturer=GENERIC, Manufacturer 1="ANBON SEMICONDUCTOR (INT'L) LIMITED", Manufacturer 2=FOSAN, Package=SOT23, Supplier Part Number 1=4530-BSS138CT-ND, HelpURL=https://mm.digikey.com/Volume0/opasdata/d220001/medias/docus/3037/BSS138.pdf, Manufacturer 3=FOSAN, Manufacturer Part Number 1=BSS138, Manufacturer Part Number 2=BSS138, Manufacturer Part Number 3=BSS138, Part Number=BSS138, Supplier 1=Digi-Key, Supplier 2=LCSC, Supplier 3=LCSC, Supplier Part Number 2=C2926186, Supplier Part Number 3=C2926186
Q7: "BCP56T 80 V, 1 A NPN medium power transistor", Manufacturer="Nexperia USA Inc.", Manufacturer 3=Nexperia, Manufacturer Part Number 1=BCP56TF, Manufacturer Part Number 3=BCP56,115, Package=SOT223-4, Supplier Part Number 1=1727-7619-1-ND, HelpURL=https://assets.nexperia.com/documents/data-sheet/BCP56T_SER.pdf, Manufacturer 1="Nexperia USA Inc.", Part Number=BCP56T, Supplier 1=Digi-Key, Supplier 3=LCSC, Supplier Part Number 3=C22239
R1 R7 R17 R18 R27 R28 R29 R30 R31 R32 R33 R34 R35 R40: "RES SM 0603 10K", Absolute Value=10000, JLC Type=Basic, Manufacturer=GENERIC, Manufacturer 1=YAGEO, Manufacturer 3="UNI-ROYAL(Uniroyal Elec)", Manufacturer Part Number 1=RC0603FR-1310KL, Manufacturer Part Number 2=RC0603FR-1010KL, Manufacturer Part Number 3=0603WAF1002T5E, Package=0603, Supplier Part Number 1=13-RC0603FR-1310KLCT-ND, Eurocircuits GPN=GPR060310K, HelpURL=https://www.yageogroup.com/content/datasheet/asset/file/PYU-RC_GROUP_51_ROHS_L, Manufacturer 2=YAGEO, Part Number=10K/0603, Supplier 1=Digi-Key, Supplier 2=Digi-Key, Supplier 3=LCSC, Supplier Part Number 2=13-RC0603FR-1010KLCT-ND, Supplier Part Number 3=C25804
R2 R4 R8 R12 R14 R16: "RES SM 0603 6K2", Absolute Value=6200, JLC Type=Basic, Manufacturer=GENERIC, Manufacturer 1=YAGEO, Manufacturer 3=UNI-ROYAL, Manufacturer Part Number 1=RC0603FR-136K2L, Manufacturer Part Number 2=RC0603FR-106K2L, Manufacturer Part Number 3=0603WAF6201T5E, Package=0603, Supplier Part Number 1=13-RC0603FR-136K2LCT-ND, Eurocircuits GPN=GPR06036K2, HelpURL=https://www.yageogroup.com/content/datasheet/asset/file/PYU-RC_GROUP_51_ROHS_L, Manufacturer 2=YAGEO, Part Number=6K2/0603, Supplier 1=Digi-Key, Supplier 2=Digi-Key, Supplier 3=LCSC, Supplier Part Number 2=13-RC0603FR-106K2LCT-ND, Supplier Part Number 3=C4260
R3 R9: "RES SM 0603 100R", Absolute Value=100, Manufacturer=GENERIC, Manufacturer 1=YAGEO, Manufacturer 3="UNI-ROYAL(Uniroyal Elec)", Manufacturer Part Number 1=RC0603FR-13100RL, Manufacturer Part Number 2=RC0603FR-10100RL, Manufacturer Part Number 3=0603WAF1000T5E, Package=0603, Supplier Part Number 1=13-RC0603FR-13100RLCT-ND, Eurocircuits GPN=GPR0603100R, HelpURL=https://www.yageogroup.com/content/datasheet/asset/file/PYU-RC_GROUP_51_ROHS_L, Manufacturer 2=YAGEO, Part Number=100R/0603, Supplier 1=Digi-Key, Supplier 2=Digi-Key, Supplier 3=LCSC, Supplier Part Number 2=13-RC0603FR-10100RLCT-ND, Supplier Part Number 3=C22775
R5 R6 R10 R11 R13 R15: "RES SM 0603 100K", Absolute Value=100000, JLC Type=Basic, Manufacturer=GENERIC, Manufacturer 1=YAGEO, Manufacturer 3="UNI-ROYAL(Uniroyal Elec)", Manufacturer Part Number 1=RC0603FR-13100KL, Manufacturer Part Number 2=RC0603FR-10100KL, Manufacturer Part Number 3=0603WAF1003T5E, Package=0603, Supplier Part Number 1=13-RC0603FR-13100KLCT-ND, Eurocircuits GPN=GPR0603100K, HelpURL=https://www.yageogroup.com/content/datasheet/asset/file/PYU-RC_GROUP_51_ROHS_L, Manufacturer 2=YAGEO, Part Number=100K/0603, Supplier 1=Digi-Key, Supplier 2=Digi-Key, Supplier 3=LCSC, Supplier Part Number 2=13-RC0603FR-10100KLCT-ND, Supplier Part Number 3=C25803
R19: "RES SM 0603 2K", Absolute Value=2000, JLC Type=Basic, Manufacturer=GENERIC, Manufacturer 1=YAGEO, Manufacturer 3="UNI-ROYAL(Uniroyal Elec)", Manufacturer Part Number 1=RC0603FR-132KL, Manufacturer Part Number 2=RC0603FR-102KL, Manufacturer Part Number 3=0603WAF2001T5E, Package=0603, Supplier Part Number 1=13-RC0603FR-132KLCT-ND, Eurocircuits GPN=GPR06032K, HelpURL=https://www.yageogroup.com/content/datasheet/asset/file/PYU-RC_GROUP_51_ROHS_L, Manufacturer 2=YAGEO, Part Number=2K/0603, Supplier 1=Digi-Key, Supplier 2=Digi-Key, Supplier 3=LCSC, Supplier Part Number 2=13-RC0603FR-102KLCT-ND, Supplier Part Number 3=C22975
R20 R21 R22 R23 R37 R42 R46: "RES SM 0603 10R", Absolute Value=10, JLC Type=Basic, Manufacturer=GENERIC, Manufacturer 1=YAGEO, Manufacturer 3=UNI-ROYAL, Manufacturer Part Number 1=RC0603FR-1310RL, Manufacturer Part Number 2=RC0603FR-1010RL, Manufacturer Part Number 3=0603WAF100JT5E, Package=0603, Supplier Part Number 1=13-RC0603FR-1310RLCT-ND, Eurocircuits GPN=GPR060310R, HelpURL=https://www.yageogroup.com/content/datasheet/asset/file/PYU-RC_GROUP_51_ROHS_L, Manufacturer 2=YAGEO, Part Number=10R/0603, Supplier 1=Digi-Key, Supplier 2=Digi-Key, Supplier 3=LCSC, Supplier Part Number 2=13-RC0603FR-1010RLCT-ND, Supplier Part Number 3=C22859
R24 R25: "RES SM 0603 4K7", Absolute Value=4700, JLC Type=Basic, Manufacturer=GENERIC, Manufacturer 1=YAGEO, Manufacturer 3="UNI-ROYAL(Uniroyal Elec)", Manufacturer Part Number 1=RC0603FR-134K7L, Manufacturer Part Number 2=RC0603FR-104K7L, Manufacturer Part Number 3=0603WAF4701T5E, Package=0603, Supplier Part Number 1=13-RC0603FR-134K7LCT-ND, Eurocircuits GPN=GPR06034K7, HelpURL=https://www.yageogroup.com/content/datasheet/asset/file/PYU-RC_GROUP_51_ROHS_L, Manufacturer 2=YAGEO, Part Number=4K7/0603, Supplier 1=Digi-Key, Supplier 2=Digi-Key, Supplier 3=LCSC, Supplier Part Number 2=13-RC0603FR-104K7LCT-ND, Supplier Part Number 3=C23162
R26: "RES SM 0603 360R", Absolute Value=360, JLC Type=Extended, Manufacturer=GENERIC, Manufacturer 1=YAGEO, Manufacturer Part Number 1=RC0603FR-13360RL, Manufacturer Part Number 2=RC0603FR-07360RL, Package=0603, Supplier Part Number 1=13-RC0603FR-13360RLCT-ND, Eurocircuits GPN=GPR0603360R, HelpURL=https://www.yageogroup.com/content/datasheet/asset/file/PYU-RC_GROUP_51_ROHS_L, Manufacturer 2=YAGEO, Manufacturer 3=YAGEO, Manufacturer Part Number 3=RC0603FR-07360RL, Part Number=360R/0603, Supplier 1=Digi-Key, Supplier 2=Digi-Key, Supplier 3=LCSC, Supplier Part Number 2=311-360HRCT-ND, Supplier Part Number 3=C137739
R36 R41: "RES SM 0603 120K", Absolute Value=120000, JLC Type=Basic, Manufacturer=GENERIC, Manufacturer 1=YAGEO, Manufacturer 3="UNI-ROYAL(Uniroyal Elec)", Manufacturer Part Number 1=RC0603FR-13120KL, Manufacturer Part Number 2=RC0603FR-10120KL, Manufacturer Part Number 3=0603WAF1203T5E, Package=0603, Supplier Part Number 1=13-RC0603FR-13120KLCT-ND, Eurocircuits GPN=GPR0603120K, HelpURL=https://www.yageogroup.com/content/datasheet/asset/file/PYU-RC_GROUP_51_ROHS_L, Manufacturer 2=YAGEO, Part Number=120K/0603, Supplier 1=Digi-Key, Supplier 2=Digi-Key, Supplier 3=LCSC, Supplier Part Number 2=13-RC0603FR-10120KLCT-ND, Supplier Part Number 3=C25808
R38 R39 R43: "RES SM 0603 30K", Absolute Value=30000, JLC Type=Basic, Manufacturer=GENERIC, Manufacturer 1=YAGEO, Manufacturer 3="UNI-ROYAL(Uniroyal Elec)", Manufacturer Part Number 1=RC0603FR-1330KL, Manufacturer Part Number 2=RC0603FR-1030KL, Manufacturer Part Number 3=0603WAF3002T5E, Package=0603, Supplier Part Number 1=13-RC0603FR-1330KLCT-ND, Eurocircuits GPN=GPR060330K, HelpURL=https://www.yageogroup.com/content/datasheet/asset/file/PYU-RC_GROUP_51_ROHS_L, Manufacturer 2=YAGEO, Part Number=30K/0603, Supplier 1=Digi-Key, Supplier 2=Digi-Key, Supplier 3=LCSC, Supplier Part Number 2=13-RC0603FR-1030KLCT-ND, Supplier Part Number 3=C22984
R44: "RES SM 0603 62K", Absolute Value=62000, JLC Type=Extended, Manufacturer=GENERIC, Manufacturer 1=YAGEO, Manufacturer 3="UNI-ROYAL(Uniroyal Elec)", Manufacturer Part Number 1=RC0603FR-1362KL, Manufacturer Part Number 2=RC0603FR-1062KL, Manufacturer Part Number 3=0603WAF6202T5E, Package=0603, Supplier Part Number 1=13-RC0603FR-1362KLCT-ND, Eurocircuits GPN=GPR060362K, HelpURL=https://www.yageogroup.com/content/datasheet/asset/file/PYU-RC_GROUP_51_ROHS_L, Manufacturer 2=YAGEO, Part Number=62K/0603, Supplier 1=Digi-Key, Supplier 2=Digi-Key, Supplier 3=LCSC, Supplier Part Number 2=13-RC0603FR-1062KLCT-ND, Supplier Part Number 3=C23221
R45: "RES SM 0603 27K", Absolute Value=27000, JLC Type=Basic, Manufacturer=GENERIC, Manufacturer 1=YAGEO, Manufacturer 3="UNI-ROYAL(Uniroyal Elec)", Manufacturer Part Number 1=RC0603FR-1327KL, Manufacturer Part Number 2=RC0603FR-1027KL, Manufacturer Part Number 3=0603WAF2702T5E, Package=0603, Supplier Part Number 1=13-RC0603FR-1327KLCT-ND, Eurocircuits GPN=GPR060327K, HelpURL=https://www.yageogroup.com/content/datasheet/asset/file/PYU-RC_GROUP_51_ROHS_L, Manufacturer 2=YAGEO, Part Number=27K/0603, Supplier 1=Digi-Key, Supplier 2=Digi-Key, Supplier 3=LCSC, Supplier Part Number 2=13-RC0603FR-1027KLCT-ND, Supplier Part Number 3=C22967
R47: "RES SM 0603 1K", Absolute Value=1000, JLC Type=Basic, Manufacturer=GENERIC, Manufacturer 1=YAGEO, Manufacturer 3="UNI-ROYAL(Uniroyal Elec)", Manufacturer Part Number 1=RC0603FR-131KL, Manufacturer Part Number 2=RC0603FR-101KL, Manufacturer Part Number 3=0603WAF1001T5E, Package=0603, Supplier Part Number 1=13-RC0603FR-131KLCT-ND, Eurocircuits GPN=GPR06031K, HelpURL=https://www.yageogroup.com/content/datasheet/asset/file/PYU-RC_GROUP_51_ROHS_L, Manufacturer 2=YAGEO, Part Number=1K/0603, Supplier 1=Digi-Key, Supplier 2=Digi-Key, Supplier 3=LCSC, Supplier Part Number 2=13-RC0603FR-101KLCT-ND, Supplier Part Number 3=C21190
R48: "RES SM 0603 0R", Absolute Value=0, JLC Type=Basic, Manufacturer=GENERIC, Manufacturer 1=YAGEO, Manufacturer 3="UNI-ROYAL(Uniroyal Elec)", Manufacturer Part Number 1=RC0603FR-070RL, Manufacturer Part Number 2=RC0603FR-130RL, Manufacturer Part Number 3=0603WAF0000T5E, Package=0603, Supplier Part Number 1=311-0.0HRCT-ND, Eurocircuits GPN=GPR06030R, HelpURL=https://www.yageogroup.com/content/datasheet/asset/file/PYU-RC_GROUP_51_ROHS_L, Manufacturer 2=YAGEO, Part Number=0R/0603, Supplier 1=Digi-Key, Supplier 2=Digi-Key, Supplier 3=LCSC, Supplier Part Number 2=13-RC0603FR-130RLCT-ND, Supplier Part Number 3=C21189
R49 R50: "RES SM 0603 1M", Absolute Value=1000000, JLC Type=Basic, Manufacturer=GENERIC, Manufacturer 1=YAGEO, Manufacturer 3="UNI-ROYAL(Uniroyal Elec)", Manufacturer Part Number 1=RC0603FR-131ML, Manufacturer Part Number 2=RC0603FR-101ML, Manufacturer Part Number 3=0603WAF1004T5E, Package=0603, Supplier Part Number 1=13-RC0603FR-131MLCT-ND, Eurocircuits GPN=GPR06031M, HelpURL=https://www.yageogroup.com/content/datasheet/asset/file/PYU-RC_GROUP_51_ROHS_L, Manufacturer 2=YAGEO, Part Number=1M/0603, Supplier 1=Digi-Key, Supplier 2=Digi-Key, Supplier 3=LCSC, Supplier Part Number 2=13-RC0603FR-101MLCT-ND, Supplier Part Number 3=C22935
SW1: "ENCODER, WITH PUSHBUTTON, 15/30", Manufacturer=Knitter-Switch, Supplier Part Number 1=3746-MERP11-15125BM7-ND, HelpURL=https://knitter-switch.com/wp-content/media/pms/Encoder/MER%2011%20_%20MERS%2011%20_%20MERP%2011%20_%20MERPS%2011/MERP11-15125BM7/MERP11-15125BM7.pdf, Manufacturer 1=Knitter-Switch, Manufacturer Part Number 1=MERP11-15125BM7, Part Number=MERP11-15125BM7, Supplier 1=Digi-Key
SW2: "Pushbutton switch panel mount 14mm diameter, black", Manufacturer="RS PRO", Manufacturer Part Number 1=7346704, Manufacturer Part Number 2=734-6704, Supplier Part Number 1=30403423, HelpURL=https://docs.rs-online.com/1486/A700000007944938.pdf, Manufacturer 1="RS PRO", Manufacturer 2="RS PRO", Part Number="BTN 14MM BLACK", Supplier 1=Distrelec, Supplier 2=RS-Components, Supplier Part Number 2=734-6704
SW3: "Pushbutton switch panel mount 14mm diameter, red", Manufacturer="RS PRO", Manufacturer Part Number 1=7346716, Manufacturer Part Number 2=734-6716, Supplier Part Number 1=30395366, HelpURL=https://docs.rs-online.com/8efa/A700000007944946.pdf, Manufacturer 1="RS PRO", Manufacturer 2="RS PRO", Part Number="BTN 14MM RED", Supplier 1=Distrelec, Supplier 2=RS-Components, Supplier Part Number 2=734-6716
TP1 TP2 TP3 TP4 TP5 TP6 TP7 TP8 TP9 TP10 TP11: "THT Test Point 1.5/0.8mm", Manufacturer=NONE, Part Number=TP_THD_1.5/0.8
U1 U2 U3 U4 U5 U6: "Optocoupler", JLC Type=Extended, Manufacturer="Diodes Incorporated", Manufacturer 3=UMW, Manufacturer Part Number 1=DPC817S-C-TR, Manufacturer Part Number 3=PC817C-S, Package=SOP-4, Supplier Part Number 1=31-DPC817S-C-TRCT-ND, HelpURL=https://www.diodes.com/assets/Datasheets/DPC817-Series.pdf, Manufacturer 1="Diodes Incorporated", Part Number="PC817C SMD", Supplier 1=Digi-Key, Supplier 3=LCSC, Supplier Part Number 3=C3008369
U7: "LP5817 3-Channel I2C Interface RGB LED Driver", JLC Type=Extended, Manufacturer="Texas Instruments", Manufacturer 3=TI, Package=SOT586, Supplier Part Number 1=296-LP5817DRLRCT-ND, HelpURL=https://www.ti.com/lit/ds/symlink/lp5817.pdf, Manufacturer 1="Texas Instruments", Manufacturer Part Number 1=LP5817DRLR, Manufacturer Part Number 3=LP5817DRLR, Part Number=LP5817DRLR, Supplier 1=Digi-Key, Supplier 3=LCSC, Supplier Part Number 3=C47262829
U8: "OPT3004DNPR, OPT3004 Ambient Light Sensor (ALS) With Excellent Angular IR Rejection, USON8", JLC Type=Extended, Manufacturer="Texas Instruments", Manufacturer 3=TI, Package=USON-8, Supplier Part Number 1=296-53402-6-ND, HelpURL=https://www.ti.com/lit/ds/symlink/opt3004.pdf, Manufacturer 1="Texas Instruments", Manufacturer Part Number 1=OPT3004DNPR, Manufacturer Part Number 3=OPT3004DNPR, Part Number=OPT3004DNPR, Supplier 1=Digi-Key, Supplier 3=LCSC, Supplier Part Number 3=C2655153